# EAGLE board Blinker_02 (EAGLE 6.6.0)
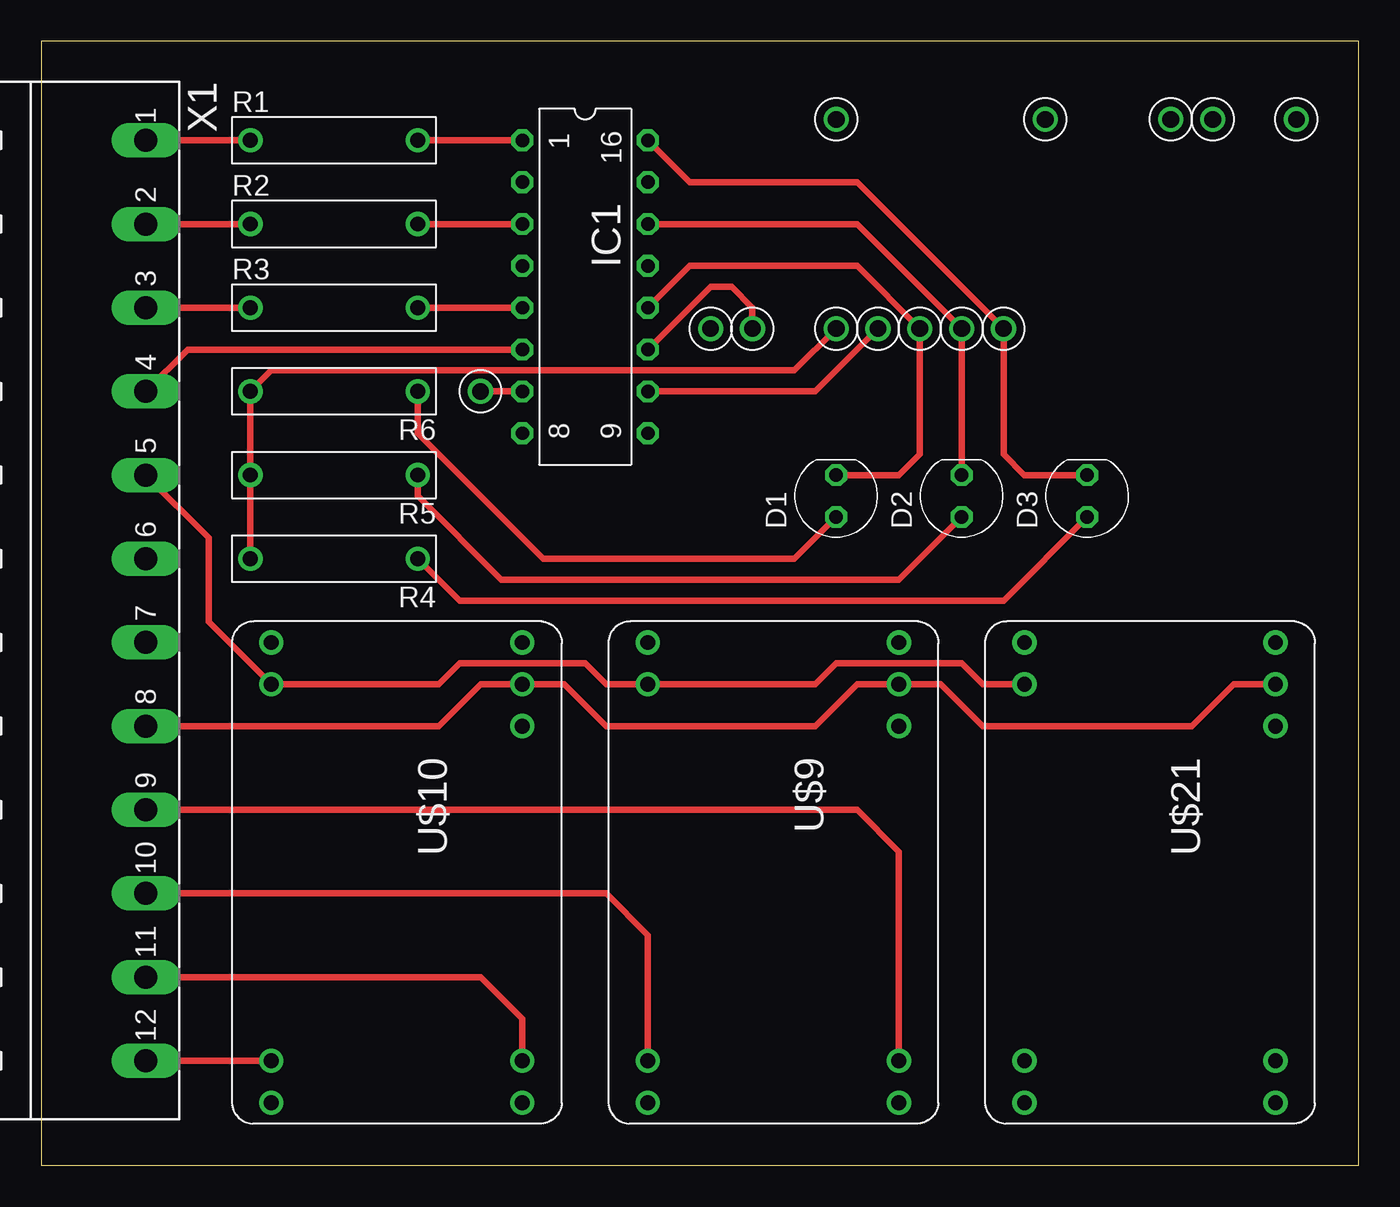
[diagram p0: board, top side]
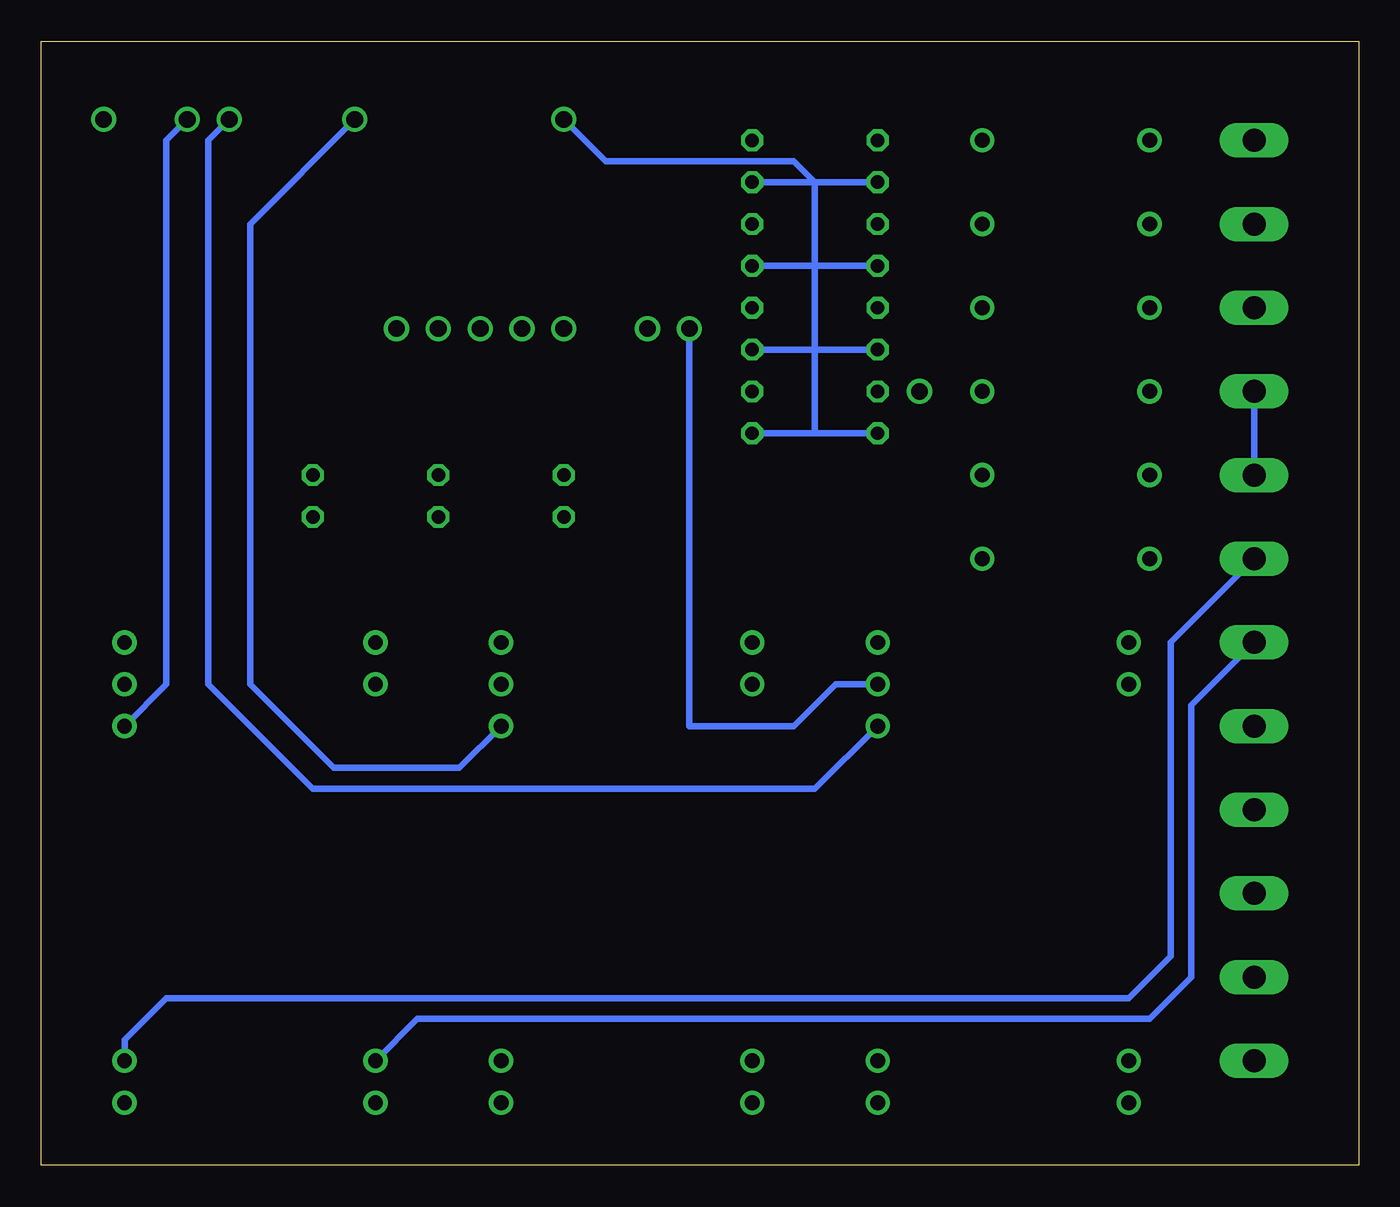
[diagram p1: board, bottom side, seen from below]

Size 79.99 x 68.25 mm. Coordinates in mm from the lower left corner, seen from the top.
Outline: 0,0 79.99,0 79.99,68.25 0,68.25 0,0
Copper layers (1*16): Top 0.035mm / dielectric 1.5mm / Bottom 0.035mm
Design rules "default": minimum track width 10mil, minimum drill 24mil, track to track 8mil, track to pad 8mil, pad to pad 8mil, via to via 8mil, smd to smd 8mil, copper to edge 40mil, drill to drill 8mil, minimum pad ring 10mil, minimum via ring 8mil, stop-mask expansion 4mil, vias tented up to drill 0mil, thermal gap 10mil

## Footprints (pad centres in the part's own frame; a part is rotated, then mirrored left to right if it is on the bottom)
THT3MM = drill 0.813 octagon: A -1.27,0; K 1.27,0
DIL16 = drill 0.813 octagon: 1 -8.89,-3.81; 2 -6.35,-3.81; 3 -3.81,-3.81; 4 -1.27,-3.81; 5 1.27,-3.81; 6 3.81,-3.81; 7 6.35,-3.81; 8 8.89,-3.81; 9 8.89,3.81; 10 6.35,3.81; 11 3.81,3.81; 12 1.27,3.81; 13 -1.27,3.81; 14 -3.81,3.81; 15 -6.35,3.81; 16 -8.89,3.81
R-10 = drill 0.9 pad 1.473: 1 -5.08,0; 2 5.08,0
TP_10 = drill 1.016: P$1 0,0
LDD-H = drill 0.9 pad 1.473: 1 -12.7,-7.62; 2 -10.16,-7.62; 11 12.7,-7.62; 12 15.24,-7.62; 13 15.24,7.62; 14 12.7,7.62; 22 -7.62,7.62; 23 -10.16,7.62; 24 -12.7,7.62
MSTBA12 = drill 1.397 long: 1 -27.94,5.08; 2 -22.86,5.08; 3 -17.78,5.08; 4 -12.7,5.08; 5 -7.62,5.08; 6 -2.54,5.08; 7 2.54,5.08; 8 7.62,5.08; 9 12.7,5.08; 10 17.78,5.08; 11 22.86,5.08; 12 27.94,5.08

## Placement (x,y rotation side)
D1  THT3MM  [THT3MM]  48.26,40.64 90 top
D2  THT3MM  [THT3MM]  55.88,40.64 90 top
D3  THT3MM  [THT3MM]  63.5,40.64 90 top
IC1  ILQ620  [DIL16]  33.02,53.34 270 top
R1  2,2k  [R-10]  17.78,62.23 0 top
R2  2,2k  [R-10]  17.78,57.15 0 top
R3  2,2k  [R-10]  17.78,52.07 0 top
R4  2,2k  [R-10]  17.78,36.83 180 top
R5  2,2k  [R-10]  17.78,41.91 180 top
R6  2,2k  [R-10]  17.78,46.99 180 top
U$1  TP_10"  [TP_10]  40.64,50.8 180 top
U$2  TP_10"  [TP_10]  43.18,50.8 180 top
U$3  TP_10"  [TP_10]  50.8,50.8 180 top
U$4  TP_10"  [TP_10]  58.42,50.8 180 top
U$5  TP_10"  [TP_10]  55.88,50.8 180 top
U$6  TP_10"  [TP_10]  53.34,50.8 180 top
U$7  TP_10"  [TP_10]  76.2,63.5 180 top
U$8  TP_10"  [TP_10]  48.26,63.5 180 top
U$9  LDD-H  [LDD-H]  44.45,19.05 270 top
U$10  LDD-H  [LDD-H]  21.59,19.05 270 top
U$21  LDD-H  [LDD-H]  67.31,19.05 270 top
U$28  TP_10"  [TP_10]  60.96,63.5 0 top
U$29  TP_10"  [TP_10]  68.58,63.5 0 top
U$30  TP_10"  [TP_10]  71.12,63.5 0 top
U$33  TP_10"  [TP_10]  26.67,46.99 0 top
U$34  TP_10"  [TP_10]  48.26,50.8 0 top
X1  MSTBA12  [MSTBA12]  1.27,34.29 270 top

## Library data of the parts
D1-D3 = LED
IC1 = optocoupler
R1-R6 = R-C
U$1-U$8 U$28-U$30 U$33 U$34 = SUPPLY
U$9 U$10 U$21 = SPEZIAL
X1 = con-phoenix-508; MPN: 1757349; OC_FARNELL: 3705250; OC_NEWARK: 71C4169

## Nets
+5V: R4.2 R5.2 R6.2 U$34.P$1
+12V: U$1.P$1 U$9.23 U$10.23 U$21.23 X1.8
GND: IC1.2 IC1.4 IC1.6 IC1.8 IC1.9 IC1.11 IC1.13 IC1.15 U$2.P$1 U$8.P$1 U$9.2 U$10.2 U$21.2 X1.4 X1.5
N$1: IC1.1 R1.2
N$2: D3.K IC1.16 U$4.P$1
N$3: D2.K IC1.14 U$5.P$1
N$4: IC1.3 R2.2
N$5: D1.K IC1.12 U$6.P$1
N$6: IC1.5 R3.2
N$7: U$9.14 X1.9
N$8: U$9.11 X1.10
N$9: U$10.14 X1.11
N$10: U$10.11 X1.12
N$11: U$21.11 X1.7
N$12: U$21.14 X1.6
N$13: U$9.22 U$28.P$1
N$14: U$10.22 U$29.P$1
N$15: U$21.22 U$30.P$1
N$16: IC1.10 U$3.P$1
N$17: IC1.7 U$33.P$1
N$18: D3.A R4.1
N$19: D2.A R5.1
N$20: D1.A R6.1
SCHALTER_LI: R2.1 X1.2
SCHALTER_RE: R1.1 X1.1
SCHALTER_RUE: R3.1 X1.3

## Tracks (layer width: path | path; a pad name or v marks a point on that pad's centre or on a via)
+5V
  Top 0.406: U$34.P$1 45.72,48.26 13.97,48.26 R6.2 R5.2 R4.2
+12V
  Top 0.406: X1.8 24.13,26.67 26.67,29.21 U$10.23 31.75,29.21 34.29,26.67 46.99,26.67 49.53,29.21 U$9.23 54.61,29.21 57.15,26.67 69.85,26.67 72.39,29.21 U$21.23
  Bottom 0.406: U$1.P$1 40.64,26.67 34.29,26.67 31.75,29.21 U$10.23
GND
  Top 0.406: X1.4 8.89,49.53 IC1.6 | U$2.P$1 43.18,52.07 41.91,53.34 40.64,53.34 IC1.11 | U$21.2 57.15,29.21 55.88,30.48 48.26,30.48 46.99,29.21 U$9.2 34.29,29.21 33.02,30.48 25.4,30.48 24.13,29.21 U$10.2 10.16,33.02 10.16,38.1 X1.5
  Bottom 0.406: IC1.15 33.02,59.69 | 33.02,59.69 33.02,54.61 | 33.02,54.61 IC1.13 | IC1.11 33.02,49.53 | 33.02,49.53 33.02,54.61 | IC1.2 33.02,59.69 | IC1.6 33.02,49.53 | 33.02,49.53 33.02,44.45 | 33.02,44.45 IC1.9 | IC1.8 33.02,44.45 | IC1.4 33.02,54.61 | U$8.P$1 45.72,60.96 34.29,60.96 33.02,59.69 | X1.5 X1.4
N$1
  Top 0.406: R1.2 IC1.1
N$2
  Top 0.406: D3.K 59.69,41.91 58.42,43.18 U$4.P$1 49.53,59.69 39.37,59.69 IC1.16
N$3
  Top 0.406: D2.K U$5.P$1 49.53,57.15 IC1.14
N$4
  Top 0.406: R2.2 IC1.3
N$5
  Top 0.406: D1.K 52.07,41.91 53.34,43.18 U$6.P$1 49.53,54.61 39.37,54.61 IC1.12
N$6
  Top 0.406: R3.2 IC1.5
N$7
  Top 0.406: U$9.14 52.07,19.05 49.53,21.59 X1.9
N$8
  Top 0.406: U$9.11 36.83,13.97 34.29,16.51 X1.10
N$9
  Top 0.406: U$10.14 29.21,8.89 26.67,11.43 X1.11
N$10
  Top 0.406: U$10.11 X1.12
N$11
  Bottom 0.406: X1.7 10.16,27.94 10.16,11.43 12.7,8.89 57.15,8.89 U$21.11
N$12
  Bottom 0.406: U$21.14 74.93,7.62 72.39,10.16 13.97,10.16 11.43,12.7 11.43,31.75 X1.6
N$13
  Bottom 0.406: U$9.22 54.61,24.13 62.23,24.13 67.31,29.21 67.31,57.15 U$28.P$1
N$14
  Bottom 0.406: U$10.22 33.02,22.86 63.5,22.86 69.85,29.21 69.85,62.23 U$29.P$1
N$15
  Bottom 0.406: U$21.22 72.39,29.21 72.39,62.23 U$30.P$1
N$16
  Top 0.406: IC1.10 46.99,46.99 U$3.P$1
N$17
  Top 0.406: U$33.P$1 IC1.7
N$18
  Top 0.406: R4.1 25.4,34.29 58.42,34.29 D3.A
N$19
  Top 0.406: D2.A 52.07,35.56 27.94,35.56 22.86,40.64 R5.1
N$20
  Top 0.406: R6.1 22.86,44.45 30.48,36.83 45.72,36.83 D1.A
SCHALTER_LI
  Top 0.406: X1.2 R2.1
SCHALTER_RE
  Top 0.406: X1.1 R1.1
SCHALTER_RUE
  Top 0.406: X1.3 R3.1